# EAGLE board tqfp44_0.8_usb_small (EAGLE 5.07)
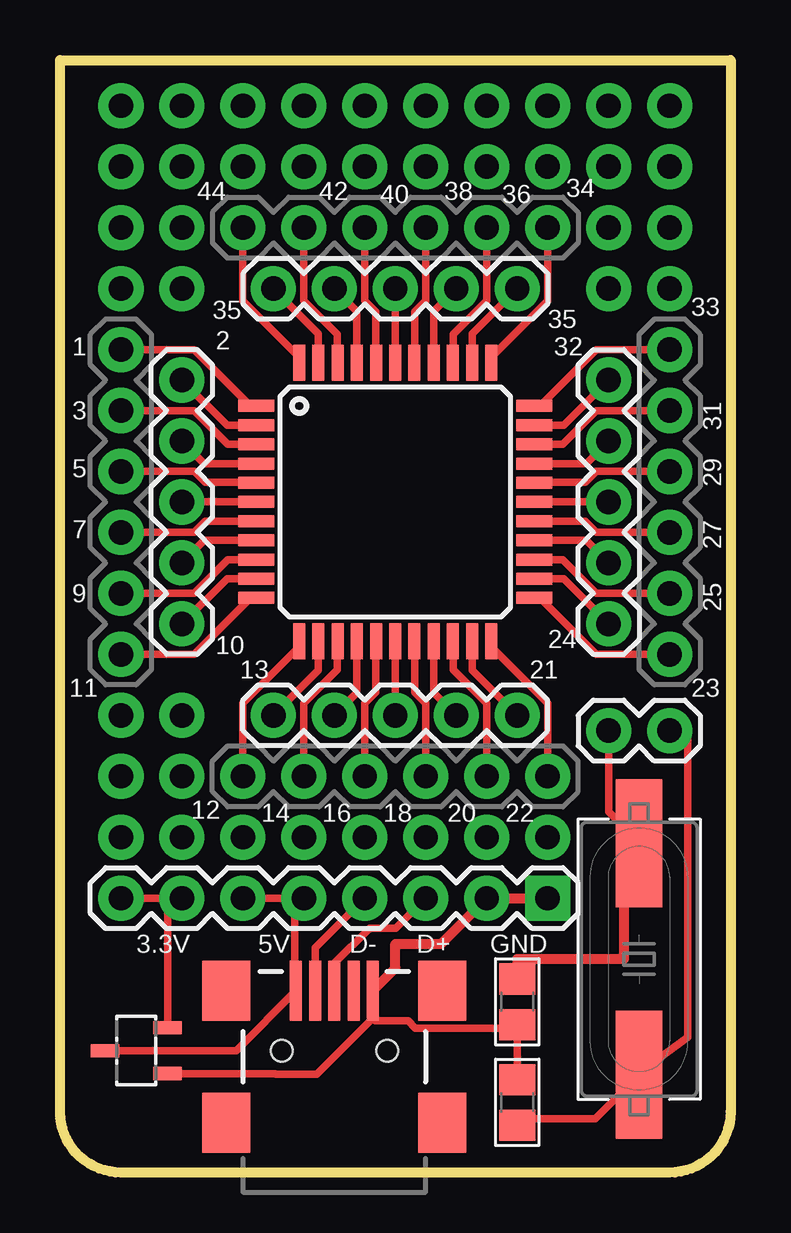
[diagram p0: board, top side]

Size 27.94 x 46.35 mm. Coordinates in mm from the lower left corner, seen from the top.
Outline: 27.94,46.35 27.94,2.54 arc-90 25.4,0 2.54,0 arc-90 0,2.54 0,46.35 27.94,46.35
Copper layers (1*16): Top 0.0356mm / dielectric 1.5011mm / Bottom 0.0356mm
Design rules "LaenPCBOrder": minimum track width 6mil, minimum drill 13mil, track to track 6mil, track to pad 6mil, pad to pad 6mil, via to via 6mil, smd to smd 6mil, copper to edge 15mil, drill to drill 6mil, minimum pad ring 7mil, minimum via ring 7mil, stop-mask expansion 4mil, vias tented up to drill 0mil, thermal gap 10mil
Net classes: 0 default: width 0.305 mm, clearance 0.102 mm

## Footprints (pad centres in the part's own frame; a part is rotated, then mirrored left to right if it is on the bottom)
USB-MINIB = smd 2.5 x 0.5: D+ 2.5,0; D- 2.5,0.8; GND 2.5,-1.6; ID 2.5,-0.8; VBUS 2.5,1.6 | smd 2.5 x 2: MTN1 -3,4.5; MTN2 2.5,4.5; MTN3 -3,-4.5; MTN4 2.5,-4.5 | hole 0.9: 0,2.2; 0,-2.2
TQFP44 = smd 1.5 x 0.5: 1 -5.8,4; 2 -5.8,3.2; 3 -5.8,2.4; 4 -5.8,1.6; 5 -5.8,0.8; 6 -5.8,0; 7 -5.8,-0.8; 8 -5.8,-1.6; 9 -5.8,-2.4; 10 -5.8,-3.2; 11 -5.8,-4; 23 5.8,-4; 24 5.8,-3.2; 25 5.8,-2.4; 26 5.8,-1.6; 27 5.8,-0.8; 28 5.8,0; 29 5.8,0.8; 30 5.8,1.6; 31 5.8,2.4; 32 5.8,3.2; 33 5.8,4 | smd 0.5 x 1.5: 12 -4,-5.8; 13 -3.2,-5.8; 14 -2.4,-5.8; 15 -1.6,-5.8; 16 -0.8,-5.8; 17 0,-5.8; 18 0.8,-5.8; 19 1.6,-5.8; 20 2.4,-5.8; 21 3.2,-5.8; 22 4,-5.8; 34 4,5.8; 35 3.2,5.8; 36 2.4,5.8; 37 1.6,5.8; 38 0.8,5.8; 39 0,5.8; 40 -0.8,5.8; 41 -1.6,5.8; 42 -2.4,5.8; 43 -3.2,5.8; 44 -4,5.8
HC49UP = smd 5.334 x 1.93: 1 -4.826,0; 2 4.826,0
1X05 = drill 1.016 pad 1.88 round: 1 0,0; 2 2.54,0; 3 5.08,0; 4 7.62,0; 5 10.16,0
1X06-KIT = drill 1.016 pad 1.88 round: 1 0,0; 2 2.54,0; 3 5.08,0; 4 7.62,0; 5 10.16,0; 6 12.7,0
2X10_NOSILK = drill 1.016 pad 1.88 round: 1 -11.43,-1.27; 2 -11.43,1.27; 3 -8.89,-1.27; 4 -8.89,1.27; 5 -6.35,-1.27; 6 -6.35,1.27; 7 -3.81,-1.27; 8 -3.81,1.27; 9 -1.27,-1.27; 10 -1.27,1.27; 11 1.27,-1.27; 12 1.27,1.27; 13 3.81,-1.27; 14 3.81,1.27; 15 6.35,-1.27; 16 6.35,1.27; 17 8.89,-1.27; 18 8.89,1.27; 19 11.43,-1.27; 20 11.43,1.27
1X02_NO_SILK = drill 1.016 pad 1.88 round: 1 0,0; 2 2.54,0
1X08 = drill 1.016 pad 1.88 square: 1 0,0 | drill 1.016 pad 1.88 round: 2 2.54,0; 3 5.08,0; 4 7.62,0; 5 10.16,0; 6 12.7,0; 7 15.24,0; 8 17.78,0
SOT23-3 = smd 0.55 x 1.2: 01 0.95,1.3; 02 -0.95,1.3; 03 0,-1.3
0805 = smd 1.3 x 1.5: 1 -0.95,0; 2 0.95,0
1X02 = drill 1.016 pad 1.88 round: 1 0,0; 2 2.54,0

## Placement (x,y rotation side)
E$1  [USB-MINIB]  11.43,5.08 90 top
E$3  [TQFP44]  13.97,27.94 0 top
E$4  [HC49UP]  24.13,8.89 90 top
E$5  [1X05]  8.89,36.83 0 top
E$6  [1X05]  22.86,22.86 90 top
E$7  [1X05]  19.05,19.05 180 top
E$8  [1X05]  5.08,33.02 270 top
E$9  [1X06-KIT]  2.54,34.29 270 top
E$10  [1X06-KIT]  20.32,16.51 180 top
E$11  [1X06-KIT]  25.4,34.29 270 top
E$12  [2X10_NOSILK]  13.97,43.18 0 top
E$13  [1X06-KIT]  7.62,39.37 0 top
E$15  [1X02_NO_SILK]  22.86,39.37 0 top
E$16  [1X08]  20.32,11.43 180 top
E$17  [1X02_NO_SILK]  2.54,13.97 0 top
E$18  [1X02_NO_SILK]  22.86,36.83 0 top
E$19  [1X02_NO_SILK]  2.54,39.37 0 top
E$20  [1X02_NO_SILK]  2.54,36.83 0 top
E$21  [1X02_NO_SILK]  2.54,19.05 0 top
E$22  [1X02_NO_SILK]  2.54,16.51 0 top
E$23  [1X02_NO_SILK]  7.62,13.97 0 top
E$24  [1X02_NO_SILK]  12.7,13.97 0 top
E$25  [1X02_NO_SILK]  17.78,13.97 0 top
E$26  [SOT23-3]  3.17,5.08 270 top
E$27  [0805]  19.05,2.92 90 top
E$28  [0805]  19.05,7.11 90 top
E$29  [1X02]  22.86,18.41 0 top

## Library data of the parts
E$1 E$5-E$13 E$15-E$25 E$29 = SparkFun
E$3 = ads4
E$4 E$26-E$28 = nonolith

## Nets
S$1: E$3.44 E$13.1
S$2: E$1.D+ E$16.3
S$3: E$1.D- E$16.4
S$4: E$1.VBUS E$16.5 E$16.6 E$26.03
S$5: E$1.GND E$16.1 E$16.2 E$26.01 E$27.2 E$28.1
S$6: E$4.1 E$27.1 E$29.2
S$7: E$4.2 E$28.2 E$29.1
S$8: E$3.43 E$5.1
S$9: E$3.42 E$13.2
S$10: E$3.41 E$5.2
S$11: E$3.40 E$13.3
S$12: E$3.39 E$5.3
S$13: E$3.38 E$13.4
S$14: E$3.37 E$5.4
S$15: E$3.36 E$13.5
S$16: E$3.35 E$5.5
S$17: E$3.34 E$13.6
S$18: E$3.33 E$11.1
S$19: E$3.32 E$6.5
S$20: E$3.31 E$11.2
S$21: E$3.30 E$6.4
S$22: E$3.29 E$11.3
S$23: E$3.28 E$6.3
S$24: E$3.27 E$11.4
S$25: E$3.26 E$6.2
S$26: E$3.25 E$11.5
S$27: E$3.24 E$6.1
S$28: E$3.23 E$11.6
S$29: E$3.22 E$10.1
S$30: E$3.21 E$7.1
S$31: E$3.20 E$10.2
S$32: E$3.19 E$7.2
S$33: E$3.18 E$10.3
S$34: E$3.17 E$7.3
S$35: E$3.16 E$10.4
S$36: E$3.15 E$7.4
S$37: E$3.14 E$10.5
S$38: E$3.13 E$7.5
S$39: E$3.12 E$10.6
S$40: E$3.11 E$9.6
S$41: E$3.10 E$8.5
S$42: E$3.9 E$9.5
S$43: E$3.8 E$8.4
S$44: E$3.7 E$9.4
S$45: E$3.6 E$8.3
S$46: E$3.5 E$9.3
S$47: E$3.4 E$8.2
S$48: E$3.3 E$9.2
S$49: E$3.2 E$8.1
S$50: E$3.1 E$9.1
S$51: E$16.7 E$16.8 E$26.02

## Tracks (layer width: path | path; a pad name or v marks a point on that pad's centre or on a via)
S$1
  Top 0.305: E$13.1 7.62,36.32 9.96,33.98 9.96,33.76 E$3.44
S$2
  Top 0.305: E$16.3 13.99,10.19 12.9,10.19 11.43,8.71 E$1.D+
S$3
  Top 0.305: E$16.4 10.64,9.37 10.64,7.59 E$1.D-
S$4
  Top 0.305: E$16.6 E$16.5 9.78,11.3 9.78,7.72 E$1.VBUS 7.34,5.08 E$26.03
S$5
  Top 0.305: 13.01,6.4 10.69,4.09 8.99,4.09 8.97,4.12 4.5,4.12 E$26.01 | 13.01,6.4 13.01,7.57 E$1.GND | 19.05,6.02 E$27.2 | 19.05,6.02 E$28.1 | 13.01,6.4 13.13,6.33 14.5,6.33 14.81,6.02 19.05,6.02
  Top 0.406: E$16.1 E$16.2 15.88,9.53 13.97,9.53 13.97,8.52 E$1.GND
S$6
  Top 0.305: E$27.1 19.05,2.23 22.3,2.23 E$4.1 24.21,4.19 26.16,5.64 26.16,18.41 E$29.2
S$7
  Top 0.305: E$29.1 22.86,15.04 24.05,13.84 E$4.2
  Top 0.406: E$4.2 23.5,13.72 23.5,8.89 19.05,8.89 E$28.2
S$8
  Top 0.305: E$5.1 10.77,34.95 10.77,33.76 E$3.43
S$9
  Top 0.305: E$13.2 10.16,36.32 11.56,34.92 11.56,33.76 E$3.42
S$10
  Top 0.305: E$5.2 12.37,35.89 12.37,33.76 E$3.41
S$11
  Top 0.305: E$13.3 12.7,36.32 13.16,35.87 13.16,33.76 E$3.40
S$12
  Top 0.305: E$3.39 E$5.3
S$13
  Top 0.305: E$13.4 15.24,36.32 14.78,35.87 14.78,33.76 E$3.38
S$14
  Top 0.305: E$5.4 15.57,35.89 15.57,33.76 E$3.37
S$15
  Top 0.305: E$13.5 17.78,36.32 16.38,34.92 16.38,33.76 E$3.36
S$16
  Top 0.305: E$5.5 17.17,34.95 17.17,33.76 E$3.35
S$17
  Top 0.305: E$13.6 20.32,36.32 17.98,33.98 17.98,33.76 E$3.34
S$18
  Top 0.305: E$11.1 22.35,34.29 20.02,31.95 19.79,31.95 E$3.33
S$19
  Top 0.305: E$6.5 20.98,31.14 19.79,31.14 E$3.32
S$20
  Top 0.305: E$11.2 22.35,31.75 20.95,30.35 19.79,30.35 E$3.31
S$21
  Top 0.305: E$6.4 21.92,29.54 19.79,29.54 E$3.30
S$22
  Top 0.305: E$11.3 22.35,29.21 21.89,28.75 19.79,28.75 E$3.29
S$23
  Top 0.305: E$3.28 E$6.3
S$24
  Top 0.305: E$11.4 22.35,26.67 21.89,27.13 19.79,27.13 E$3.27
S$25
  Top 0.305: E$6.2 21.92,26.34 19.79,26.34 E$3.26
S$26
  Top 0.305: E$11.5 22.35,24.13 20.95,25.53 19.79,25.53 E$3.25
S$27
  Top 0.305: E$6.1 20.98,24.74 19.79,24.74 E$3.24
S$28
  Top 0.305: E$11.6 22.35,21.59 20.02,23.93 19.79,23.93 E$3.23
S$29
  Top 0.305: E$10.1 20.32,19.56 17.98,21.89 17.98,22.12 E$3.22
S$30
  Top 0.305: E$7.1 17.17,20.93 17.17,22.12 E$3.21
S$31
  Top 0.305: E$10.2 17.78,19.56 16.38,20.95 16.38,22.12 E$3.20
S$32
  Top 0.305: E$7.2 15.57,19.99 15.57,22.12 E$3.19
S$33
  Top 0.305: E$10.3 15.24,19.56 14.78,20.02 14.78,22.12 E$3.18
S$34
  Top 0.305: E$7.3 E$3.17
S$35
  Top 0.305: E$10.4 12.7,19.56 13.16,20.02 13.16,22.12 E$3.16
S$36
  Top 0.305: E$7.4 12.37,19.99 12.37,22.12 E$3.15
S$37
  Top 0.305: E$10.5 10.16,19.56 11.56,20.95 11.56,22.12 E$3.14
S$38
  Top 0.305: E$7.5 10.77,20.93 10.77,22.12 E$3.13
S$39
  Top 0.305: E$10.6 7.62,19.56 9.96,21.89 9.96,22.12 E$3.12
S$40
  Top 0.305: E$9.6 5.59,21.59 7.92,23.93 8.15,23.93 E$3.11
S$41
  Top 0.305: E$8.5 6.96,24.74 8.15,24.74 E$3.10
S$42
  Top 0.305: E$9.5 5.59,24.13 6.99,25.53 8.15,25.53 E$3.9
S$43
  Top 0.305: E$8.4 6.02,26.34 8.15,26.34 E$3.8
S$44
  Top 0.305: E$9.4 5.59,26.67 6.04,27.13 8.15,27.13 E$3.7
S$45
  Top 0.305: E$8.3 E$3.6
S$46
  Top 0.305: E$9.3 5.59,29.21 6.04,28.75 8.15,28.75 E$3.5
S$47
  Top 0.305: E$8.2 6.02,29.54 8.15,29.54 E$3.4
S$48
  Top 0.305: E$9.2 5.59,31.75 6.99,30.35 8.15,30.35 E$3.3
S$49
  Top 0.305: E$8.1 6.96,31.14 8.15,31.14 E$3.2
S$50
  Top 0.305: E$9.1 5.59,34.29 7.92,31.95 8.15,31.95 E$3.1
S$51
  Top 0.305: E$26.02 4.5,6.04 4.5,10.85 E$16.7 E$16.8

## Text on the board
tNames: 44 | 42 | 38 | 34 | 40 | 36 | 35 | 33 | 35 | 1 | 2 | 32 | 31 | 3 | 5 | 29 | 27 | 7 | 9 | 25 | 10 | 24 | 13 | 21 | 11 | 23 | 12 | 14 | 16 | 18 | 20 | 22 | 3.3V | 5V | D- | D+ | GND
bNames: Public Domain | TQFP44 0.8mm | www.nonolithlabs.com/breakout/